# Altium PCB DEV_board_PCB.PcbDoc
Units mil, origin at the board's own origin, x right, y up, seen from the top; angles counter-clockwise.
Board outline 6000 x 4000 mil, 2 copper layers (Top Layer, Bottom Layer); 30 components, 57 nets, 212 pads, 0 vias.
Unrouted connection lines stored in the file: 63.
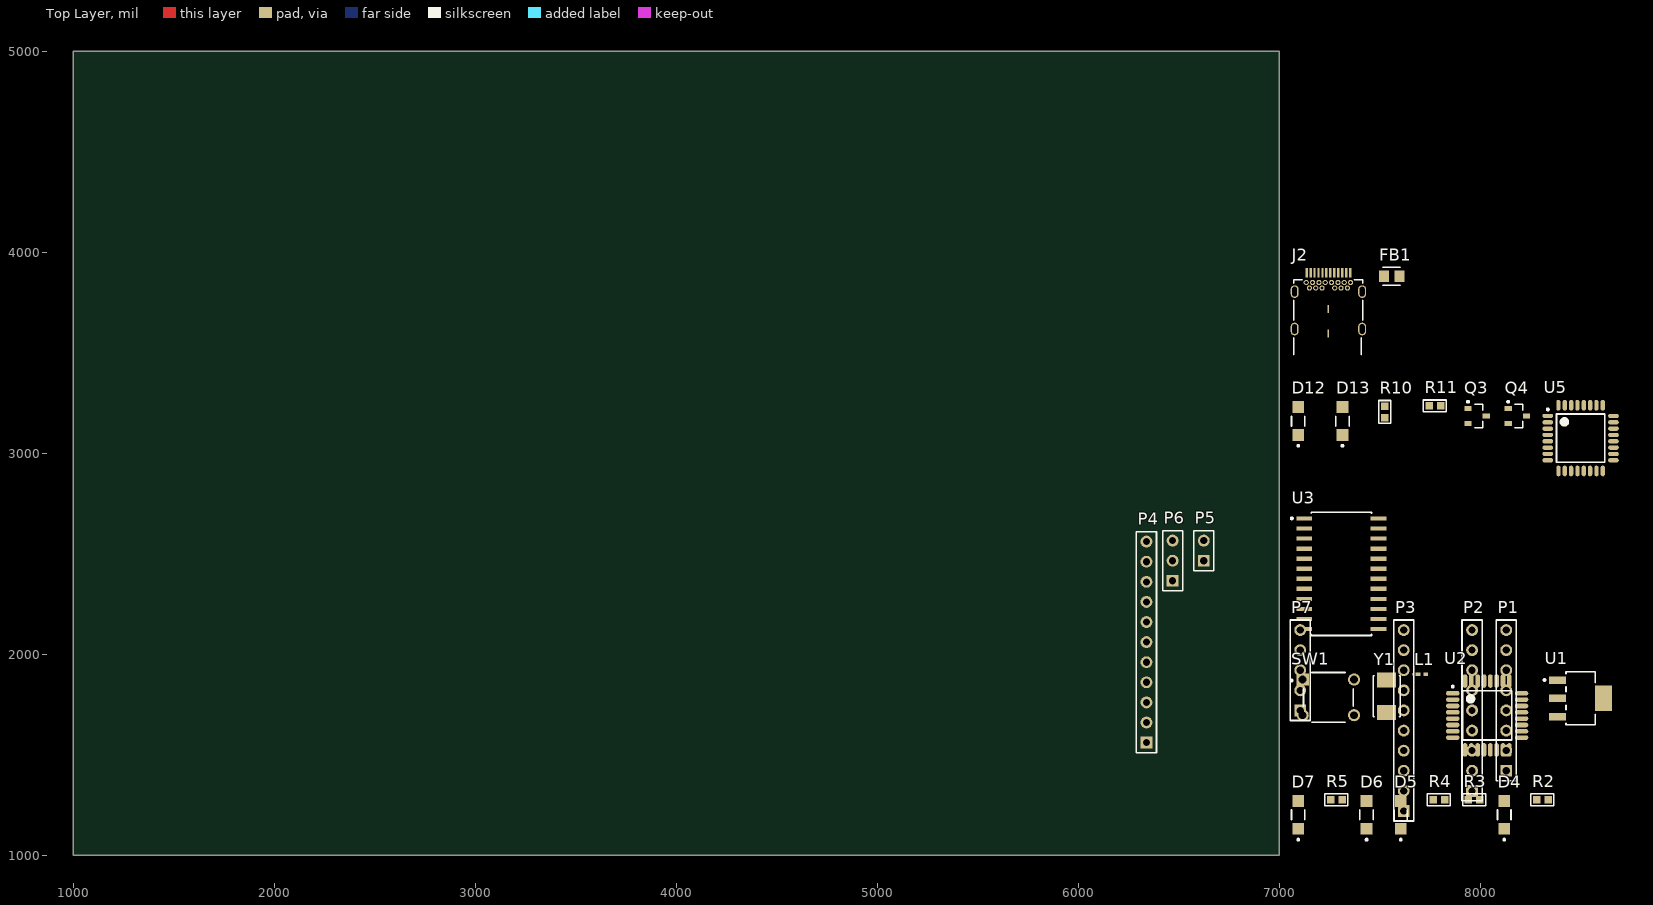
[diagram p0: Top Layer view]
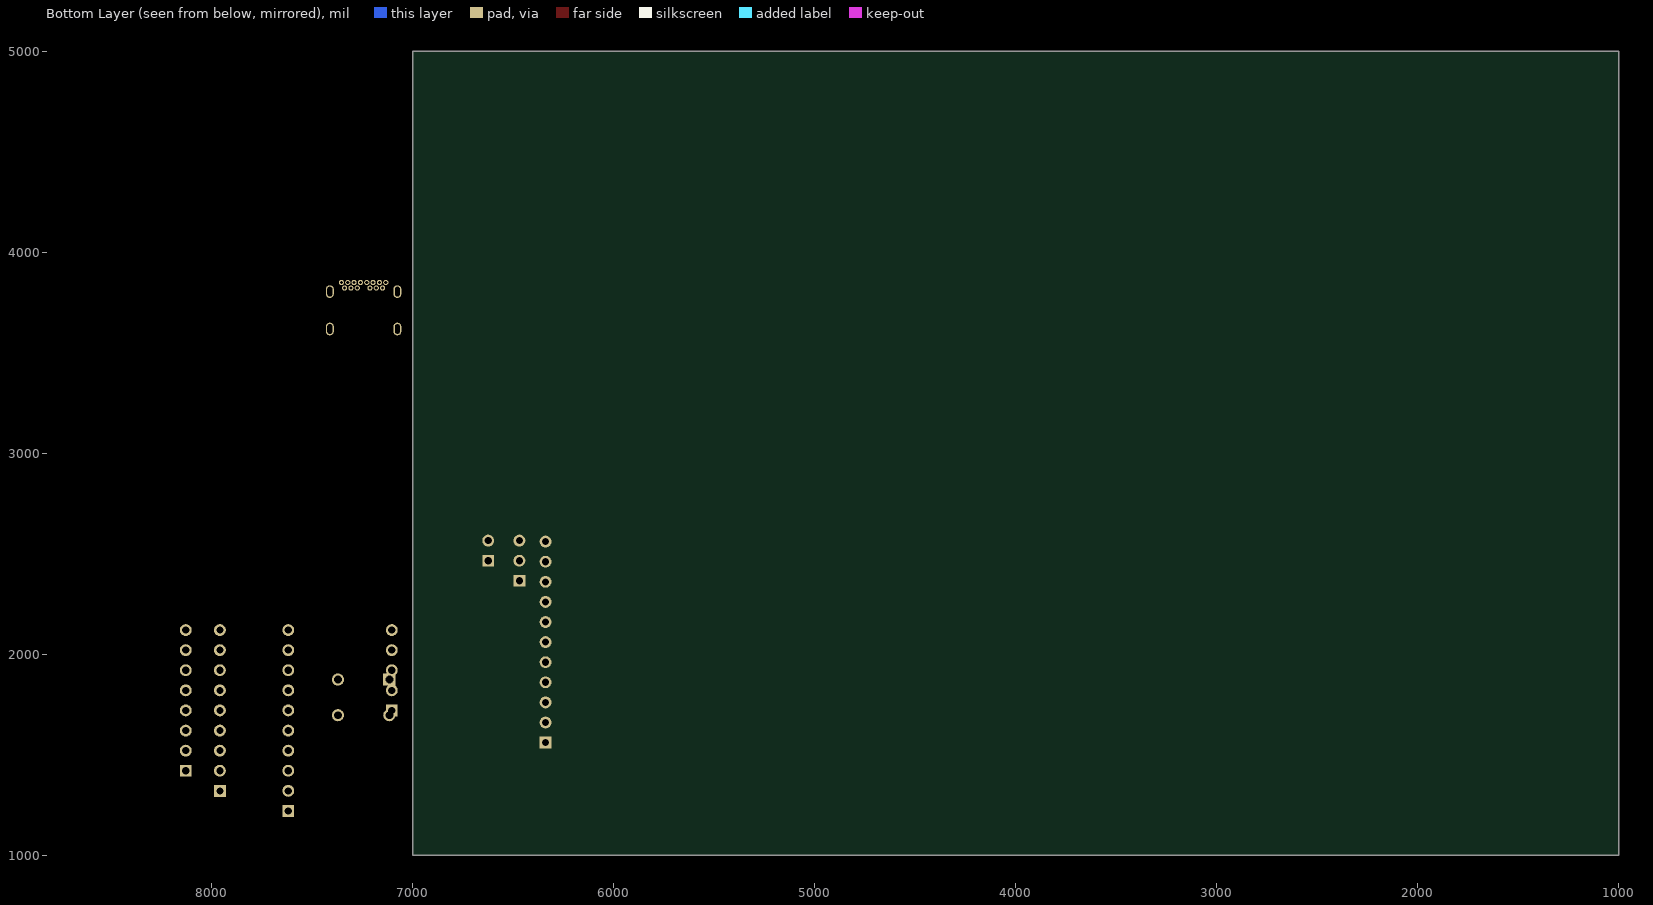
[diagram p1: Bottom Layer view, seen from below]

## Layer stack, top to bottom
Top Solder: solder mask 0.4, Solder Resist, Dk 3.5
Top Layer: signal copper 1.4
Dielectric 1: dielectric 12.6, FR-4, Dk 4.8
Bottom Layer: signal copper 1.4
Bottom Solder: solder mask 0.4, Solder Resist, Dk 3.5

## Board outline
1000,1000 7000,1000 7000,5000 1000,5000

## Design rules (kind name [scope] priority, off if disabled: settings)
Clearance [All] p1: gap=10 ignorepadtopadclearanceinfootprint=FALSE except(0: Arc-Hole Track-Hole SMDPad-Hole THPad-Hole Via-Hole Fill-Hole Poly-Hole Region-Hole Text-Hole)
DiffPairsRouting [All] p1: maxlimit=10 minlimit=10 mostfreqgap=10 toplayer_minwidth=15 toplayer_maxwidth=15 toplayer_prefwidth=15 bottomlayer_minwidth=15 bottomlayer_maxwidth=15 bottomlayer_prefwidth=15 maxuncoupledlength=500
PolygonConnect [All] p1: connectstyle=Relief reliefconductorwidth=10 reliefentries=4 polygonreliefangle="90 Angle" airgapwidth=10
RoomDefinition Designator_5 [InComponentClass('Designator')] p1: confinementstyle=ConfineIn formatcopy=TRUE lockcomponents=FALSE outline 0,0 2000,0 2000,1000 0,1000
RoomDefinition Designator_4 [InComponentClass('Designator')] p2: confinementstyle=ConfineIn formatcopy=TRUE lockcomponents=FALSE outline 0,0 2000,0 2000,1000 0,1000
RoomDefinition Connectors [InComponentClass('Connectors')] p3: confinementstyle=ConfineIn formatcopy=TRUE lockcomponents=FALSE outline 7045,1060 8190,1060 8190,2280 7045,2280
RoomDefinition USB_in [InComponentClass('USB_in')] p4: confinementstyle=ConfineIn formatcopy=TRUE lockcomponents=FALSE outline 7045,3425 7655,3425 7655,4035 7045,4035
RoomDefinition Designator [InComponentClass('Designator')] p5: confinementstyle=ConfineIn formatcopy=TRUE lockcomponents=FALSE outline 7045,2875 8700,2875 8700,3375 7045,3375
RoomDefinition Designator [InComponentClass('Designator')] p6: confinementstyle=ConfineIn formatcopy=TRUE lockcomponents=FALSE outline 7045,2875 8700,2875 8700,3375 7045,3375
RoutingVias [All] p1: holewidth=28 width=50 viastyle="Through Hole" minholewidth=28 minwidth=50 maxholewidth=28 maxwidth=50
SolderMaskExpansion [All] p1: expansion=4 istentingtop=FALSE
Width [All] p1: maxlimit=10 minlimit=10 preferedwidth=10
29 further rules are at their usual default settings.

## Classes and differential pairs
component class Connectors: P1 P2 P3 P4 P5 P6 P7
component class USB_in: C20 C21 C22 C23 D8 D9 D10 D11 FB1 FL1 J2
component class Designator: C24 C25 C26 C27 C28 D12 D13 Q3 Q4 R6 R7 R8 R9 R10 R11 U5
differential pair D: +D_P -D_N
differential pair DC: +DC_P -DC_N

## Components (designator, comment, footprint, x,y, rotation, side; value= is the part's Value field where it differs from the comment)
D4 "HSMS-C150" FP-HSMS-C150-MFG 8120,1200 r90 top
D5 "HSMS-C150" FP-HSMS-C150-MFG 7605,1200 r90 top
D6 "HSMS-C150" FP-HSMS-C150-MFG 7435,1200 r90 top
D7 "HSMS-C150" FP-HSMS-C150-MFG 7095,1200 r90 top
D12 "HSMS-C150" FP-HSMS-C150-MFG 7095,3160 r90 top
D13 "HSMS-C150" FP-HSMS-C150-MFG 7315,3160 r90 top
FB1 "MI0805K400R-10" FP-MI0805-MFG 7560,3880 r0 top
J2 "632723100011" 632723100011 7245,3665 r0 top
L1 "10uH" 0402-A 7710,1900 r0 top
P1 "Header 8" HDR1X8 8130,1420 r90 top
P2 "Header 9" HDR1X9 7960,1320 r90 top
P3 "Header 10" HDR1X10 7620,1220 r90 top
P4 "Header 11" HDR1X11 6340,1560 r90 top
P5 "Header 2" HDR1X2 6625,2465 r90 top
P6 "Header 3" HDR1X3 6470,2365 r90 top
P7 "Header 5" HDR1X5 7105,1720 r90 top
Q3 "MOSFET-P" "Tran SOT23" 7985,3185 r0 top
Q4 "MOSFET-P" "Tran SOT23" 8185,3185 r0 top
R2 "150R" "RES 0603 SILK" 8310,1275 r0 top
R3 "150R" "RES 0603 SILK" 7970,1275 r0 top
R4 "150R" "RES 0603 SILK" 7795,1275 r0 top
R5 "150R" "RES 0603 SILK" 7285,1275 r0 top
R10 "150R" "RES 0603 SILK" 7525,3205 r90 top
R11 "150R" "RES 0603 SILK" 7775,3235 r0 top
SW1 "1825910-2" FP-1825910-2-0 7245,1785 r0 top
U1 "LM3940IMP-3.3/NOPB" FP-DCY0004A-MFG 8500,1780 r0 top
U2 "ATMEGA328PB-AU" ATML-32A_M 8035,1695 r0 top
U3 "MAX7221CWG+" FP-W24-1-MFG 7310,2400 r0 top
U5 "FT232BL" LQFP-32_L 8500,3075 r0 top
Y1 "ABM3-8.000MHZ-D2Y-T" FP-ABM3-MFG 7535,1790 r90 top

## Footprints (in the part's own frame and the unit in brackets; to place one, negate y for a bottom-side part, rotate by r counter-clockwise, add the part's x,y. Pads: shape width x height; smd on the part's side, far side on the other; paste and mask are expansions set on the pad)
0402-A [mm] "Chip Inductor, Body 1.0x0.5mm, IPC High Density"
  rect 0.6x0.5 smd: 1(-0.5,0) 2(0.5,0)
  silkscreen extent -1.1,-0.15 -1.1,0.15, body extent -0.55,-0.3 0.55,0.3, height 0.55
632723100011 [mm] "USB 3.1 Type C Receptacle Horizontal THR"
  rect 0.3x1.2 smd: A1(-2.75,5.93) A2(-2.25,5.93) A3(-1.75,5.93) A4(-1.25,5.93) A5(-0.75,5.93) A6(-0.25,5.93) A7(0.25,5.93) A8(0.75,5.93) A9(1.25,5.93) A10(1.75,5.93) A11(2.25,5.93) A12(2.75,5.93)
  round 0.65 hole 0.4: B1(2.8,4.68) B2(2.4,3.98) B3(1.6,3.98) B4(1.2,4.68) B5(0.8,3.98) B6(0.4,4.68) B7(-0.4,4.68) B8(-0.8,3.98) B9(-1.2,4.68) B10(-1.6,3.98) B11(-2.4,3.98) B12(-2.8,4.68) G1(2,4.68) G2(-2,4.68)
  oval 1x1.6 hole 0.6 slot 1.2 at 90 deg: Shell(-4.27,-1.2) Shell(-4.27,3.53) Shell(4.27,-1.2) Shell(4.27,3.53)
  rect 0.2x1 smd: Shell(0,-1.75) Shell(0,1.35)
  silkscreen extent -4.37,-4.45 4.34,5, body extent -4.37,-5.6 4.37,6.19, height 3.05
ATML-32A_M [mm] "TQFP, 32-Leads, Body 7x7mm, Pitch 0.8mm, IPC Low Density"
  oval 1.7x0.6 smd: 1(-4.35,2.8) 2(-4.35,2) 3(-4.35,1.2) 4(-4.35,0.4) 5(-4.35,-0.4) 6(-4.35,-1.2) 7(-4.35,-2) 8(-4.35,-2.8) 17(4.35,-2.8) 18(4.35,-2) 19(4.35,-1.2) 20(4.35,-0.4) 21(4.35,0.4) 22(4.35,1.2) 23(4.35,2) 24(4.35,2.8)
  oval 0.6x1.7 smd: 9(-2.8,-4.35) 10(-2,-4.35) 11(-1.2,-4.35) 12(-0.4,-4.35) 13(0.4,-4.35) 14(1.2,-4.35) 15(2,-4.35) 16(2.8,-4.35) 25(2.8,4.35) 26(2,4.35) 27(1.2,4.35) 28(0.4,4.35) 29(-0.4,4.35) 30(-1.2,4.35) 31(-2,4.35) 32(-2.8,4.35)
  silkscreen extent -4.47,-3.1 3.1,3.77, body extent -4.5,-4.5 4.5,4.5, height 1.2
FP-1825910-2-0 [mm]
  rect 1.54x1.54 hole 0.99 paste-1000 mask+0: 1(-3.25,2.25)
  round 1.54 hole 0.99 paste-1000 mask+0: 2(3.25,2.25) 3(-3.25,-2.25) 4(3.25,-2.25)
  silkscreen extent -4.79,-3.15 3.15,3.15, body extent -4.12,-3.24 4.12,3.24, height 0.25
FP-ABM3-MFG [mm]
  rect 1.9x2.4 smd paste+0 mask+0: 1(-2.05,0) 2(2.05,0)
  silkscreen extent -2.6,-1.7 2.6,1.7, body extent -3.1,-1.8 3.1,1.8, height 0.25
FP-DCY0004A-MFG [mm]
  rect 2.15x0.95 smd paste+0 mask+0: 1(-2.9,2.3) 2(-2.9,0) 3(-2.9,-2.3)
  rect 2.15x3.25 smd paste+0 mask+0: 4(2.9,0)
  silkscreen extent -4.7,-3.35 1.85,3.35, body extent -4.08,-3.45 4.08,3.45, height 0.25
FP-HSMS-C150-MFG [mm]
  rect 1.5x1.5 smd paste+0 mask+0: 1(-1.75,0) 2(1.75,0)
  silkscreen extent -3.25,-0.85 0.63,0.85, body extent -2.6,-0.95 2.6,0.95, height 0.25
FP-MI0805-MFG [mm]
  rect 1.285x1.47 smd paste+0 mask+0: 1(-0.972,0) 2(0.972,0)
  silkscreen extent -1.1,-1.12 1.1,1.12, body extent -1.72,-0.83 1.72,0.83, height 0.25
FP-W24-1-MFG [mil]
  rect 78x21 smd paste+0 mask+0: 1(-184.5,275) 2(-184.5,225) 3(-184.5,175) 4(-184.5,125) 5(-184.5,75) 6(-184.5,25) 7(-184.5,-25) 8(-184.5,-75) 9(-184.5,-125) 10(-184.5,-175) 11(-184.5,-225) 12(-184.5,-275) 13(184.5,-275) 14(184.5,-225) 15(184.5,-175) 16(184.5,-125) 17(184.5,-75) 18(184.5,-25) 19(184.5,25) 20(184.5,75) 21(184.5,125) 22(184.5,175) 23(184.5,225) 24(184.5,275)
  silkscreen extent -252,-307 150,307, body extent -227,-314 227,314, height 10
HDR1X2 [mm] "Connector; Header; 2 Position"
  rect 1.5x1.5 hole 0.9: 1(0,0)
  round 1.5 hole 0.9: 2(2.54,0)
  silkscreen extent -1.27,-1.27 3.81,1.27
HDR1X3 [mm] "Connector; Header; 3 Position"
  rect 1.5x1.5 hole 0.9: 1(0,0)
  round 1.5 hole 0.9: 2(2.54,0) 3(5.08,0)
  silkscreen extent -1.27,-1.27 6.35,1.27
HDR1X5 [mm] "Connector; Header; 5 Position"
  rect 1.5x1.5 hole 0.9: 1(0,0)
  round 1.5 hole 0.9: 2(2.54,0) 3(5.08,0) 4(7.62,0) 5(10.16,0)
  silkscreen extent -1.27,-1.27 11.43,1.27
HDR1X8 [mm] "Connector; Header; 8 Position"
  rect 1.5x1.5 hole 0.9: 1(0,0)
  round 1.5 hole 0.9: 2(2.54,0) 3(5.08,0) 4(7.62,0) 5(10.16,0) 6(12.7,0) 7(15.24,0) 8(17.78,0)
  silkscreen extent -1.27,-1.27 19.05,1.27
HDR1X9 [mm] "Connector; Header; 9 Position"
  rect 1.5x1.5 hole 0.9: 1(0,0)
  round 1.5 hole 0.9: 2(2.54,0) 3(5.08,0) 4(7.62,0) 5(10.16,0) 6(12.7,0) 7(15.24,0) 8(17.78,0) 9(20.32,0)
  silkscreen extent -1.27,-1.27 21.59,1.27
HDR1X10 [mm] "Connector; Header; 10 Position"
  rect 1.5x1.5 hole 0.9: 1(0,0)
  round 1.5 hole 0.9: 2(2.54,0) 3(5.08,0) 4(7.62,0) 5(10.16,0) 6(12.7,0) 7(15.24,0) 8(17.78,0) 9(20.32,0) 10(22.86,0)
  silkscreen extent -1.27,-1.27 24.13,1.27
HDR1X11 [mm] "Connector; Header; 11 Position"
  rect 1.5x1.5 hole 0.9: 1(0,0)
  round 1.5 hole 0.9: 2(2.54,0) 3(5.08,0) 4(7.62,0) 5(10.16,0) 6(12.7,0) 7(15.24,0) 8(17.78,0) 9(20.32,0) 10(22.86,0) 11(25.4,0)
  silkscreen extent -1.27,-1.27 26.67,1.27
LQFP-32_L [mm] "Thin QFP, 32-Leads, Body 7x7mm, Pitch 0.8mm, IPC High Density"
  oval 1.35x0.55 smd: 1(-4.15,2.8) 2(-4.15,2) 3(-4.15,1.2) 4(-4.15,0.4) 5(-4.15,-0.4) 6(-4.15,-1.2) 7(-4.15,-2) 8(-4.15,-2.8) 17(4.15,-2.8) 18(4.15,-2) 19(4.15,-1.2) 20(4.15,-0.4) 21(4.15,0.4) 22(4.15,1.2) 23(4.15,2) 24(4.15,2.8)
  oval 0.55x1.35 smd: 9(-2.8,-4.15) 10(-2,-4.15) 11(-1.2,-4.15) 12(-0.4,-4.15) 13(0.4,-4.15) 14(1.2,-4.15) 15(2,-4.15) 16(2.8,-4.15) 25(2.8,4.15) 26(2,4.15) 27(1.2,4.15) 28(0.4,4.15) 29(-0.4,4.15) 30(-1.2,4.15) 31(-2,4.15) 32(-2.8,4.15)
  silkscreen extent -4.27,-3.05 3.05,3.75, body extent -3.5,-3.5 3.5,3.5, height 1.2
"RES 0603 SILK" [mm]
  rect 0.95x0.95 smd: 1(-0.725,0) 2(0.725,0)
  silkscreen extent -1.45,-0.75 1.45,0.75, body extent -0.85,-0.48 0.85,0.48, height 0.55
"Tran SOT23" [mm] "SOT23, 3-Leads, Body 2.90x2.30mm, Pitch 0.95mm, IPC Medium Density"
  rect 0.9x0.6 smd: 1(-1.15,0.95) 2(-1.15,-0.95) 3(1.15,0)
  silkscreen extent -1.27,-1.5 0.7,1.92, body extent -0.7,-1.5 0.7,1.5, height 1.1

## Part data
D4 D5 D6 D7 D12 D13: library part CMP-21615-000001-1, "LED RED DIFFUSED CHIP SMD", Case Code (Imperial)=1206, Case Code (Metric)=3216, Color=Red, Forward Current=20mA, Forward Voltage=2.1V, Lens Color=White, Max Operating Temperature=85°C, Min Operating Temperature=-40°C, Package Quantity=1, Power Dissipation=65mW, Reverse Voltage=5V, Case/Package=1206, Depth=1.6mm, Dominant Wavelength=626nm, Height=1.1mm, Illumination Color=Red, Lead Free="Lead Free", Length=3.2mm, Lens Style=Rectangular, Lens Transparency=Diffused, Luminous Intensity=10mcd, Mount="Surface Mount", Number of Elements=1, Number of LEDs=1, Number of Pins=2, Packaging="Tape and Reel", Power Rating=65mW, Radiation Hardening=No, REACH SVHC="No SVHC", Test Current=20mA, Viewing Angle=170°, Wavelength=626nm, Width=1.6mm
FB1: library part CMP-2000-06702-2, "FERRITE BEAD 40 OHM 0805 1LN", Case Code (Imperial)=0805, Case Code (Metric)=2012, Current Rating=1.5A, DC Resistance (DCR)=50mR, Frequency=100MHz, Max Operating Temperature=125°C, Min Operating Temperature=-40°C, Package Quantity=1, Tolerance=25%, Case/Package=0805, Contact Plating=Tin, Core Material=Ferrite, Depth=1.45mm, Height=0.043inch, Impedance=40R, Lead Free="Lead Free", Length=2mm, Material=Ferrite, Max Current Rating=1.5A, Max DC Current=1.5A, Mount="Surface Mount", Number of Lines=1, Packaging="Tape and Reel", Termination=SMD/SMT, Test Frequency=100MHz, Weight=0.00392oz, Width=0.049inch
J2: library part CMP-1502-03213-1, "USB 3.1 Type C Receptacle WR-COM, Horizontal, SMT / THT", Contact Resistance=30mOhm, Manufacturer="Wurth Elektronik", Operating Temperature=-40to105degC, Rated Current=5A, Working Voltage=20VDC, Connector Type=USB3.1TypeC, Datasheet URL=https://katalog.we-online.de/em/datasheet/632723x00011%282%29.pdf, Gender=Receptacle, Manufacturer URL=http://www.we-online.de, Mounting Technology=SMT/THT, Orientation=Horizontal, Package Reference=632723100011, Packaging=TapeandReel, Part Number=632723100011, Publisher=WurthElektronik
L1: "Inductor", Code_IEC=1005, Code_JEITA=0402, LatestRevisionDate=29-May-2009, LatestRevisionNote="IPC-7351 Footprint Added.", PackageDescription="Chip Inductor", PackageReference=0402-A, Published=8-Jun-2000, Publisher="Altium Limited"
P1: "Header, 8-Pin", LatestRevisionDate=17-Jul-2002, LatestRevisionNote="Re-released for DXP Platform.", Publisher="Altium Limited"
P2: "Header, 9-Pin", LatestRevisionDate=17-Jul-2002, LatestRevisionNote="Re-released for DXP Platform.", Publisher="Altium Limited"
P3: "Header, 10-Pin", LatestRevisionDate=17-Jul-2002, LatestRevisionNote="Re-released for DXP Platform.", Publisher="Altium Limited"
P4: "Header, 11-Pin", LatestRevisionDate=17-Jul-2002, LatestRevisionNote="Re-released for DXP Platform.", Publisher="Altium Limited"
P5: "Header, 2-Pin", LatestRevisionDate=17-Jul-2002, LatestRevisionNote="Re-released for DXP Platform.", Publisher="Altium Limited"
P6: "Header, 3-Pin", LatestRevisionDate=17-Jul-2002, LatestRevisionNote="Re-released for DXP Platform.", Publisher="Altium Limited"
P7: "Header, 5-Pin", LatestRevisionDate=17-Jul-2002, LatestRevisionNote="Re-released for DXP Platform.", Publisher="Altium Limited"
Q3 Q4: "P-Channel MOSFET", LatestRevisionDate=17-Jul-2002, LatestRevisionNote="Re-released for DXP Platform.", PackageDescription="TO, Flat Index; 3 In-Line, Axial Leads; Body Dia. 4.6mm; Lead Dia. 0.5 mm (max)", PackageReference=E3, PackageVersion=1995/1996, Published=8-Jun-2000, Publisher="Altium Limited"
R2 R3 R4 R5 R10 R11: "Resistor", LatestRevisionDate=17-Jul-2002, LatestRevisionNote="Re-released for DXP Platform.", PackageDescription="Axial Device, Thru-Hole; 2 Leads; 0.3 in Pin Spacing", PackageReference=AXIAL-0.3, Published=8-Jun-2000, Publisher="Altium Limited"
SW1: library part CMP-03407-000004-1, "SWITCH TACTILE SPST-NO 0.05A 24V", Contact Current Rating=50mA, Contact Resistance=100mΩ, Manufacturer=TE, Operating Force=160gf, Package=0, Temperature="-35°C to +85°C", Temperature Range High=+85°C, Temperature Range Low=-35°C, Voltage Rating Dc=24V, Automotive=No, Category=Switch, ComponentLink2Description=Datasheet, ComponentLink2URL=https://www.te.com/commerce/DocumentDelivery/DDEController?Action=showdoc&DocId=Customer+Drawing%7F1825910%7FC10%7Fpdf%7FEnglish%7FENG_CD_1825910_C10.pdf%7F1825910-2, Device Class L1=Electromechanical, Device Class L2=Switches, Device Class L3="Tactile Switches", Digikey Description="SWITCH TACTILE SPST-NO 0.05A 24V", Electromechanical Life=100000Cycles, Height=4.6mm, Lead Free=Yes, Manufacturer Part Number=1825910-2, Mount="Through Hole", Octopart=https://octopart.com/1825910-2-te+connectivity-42270502, RoHS=TRUE, Throw Configuration=SPST-NO
U1: library part CMP-0062-01788-4, "IC REG LINEAR 3.3V 1A SOT223-4", Case/Package=SOT-223, Current Rating=1A, Dropout Voltage=500mV, Max Input Voltage=7.5V, Max Operating Temperature=125°C, Max Output Voltage=3.3V, Min Input Voltage=4.5V, Min Operating Temperature=-40°C, Package Quantity=1000, Quiescent Current=15mA, Contact Plating=Tin, Height=1.6mm, Lead Free="Lead Free", Length=6.5mm, Max Output Current=1A, Max Supply Voltage=7.5V, Min Supply Voltage=4.5V, Mount="Surface Mount", Nominal Output Voltage=3.3V, Number of Outputs=1, Number of Pins=4, Number of Regulators=1, Output Configuration=Positive, Output Current=1A, Output Type=Fixed, Output Voltage=3.3V, Packaging="Tape and Reel", Polarity=Positive, Radiation Hardening=No, REACH SVHC="No SVHC", Series=-, Termination=SMD/SMT, Width=3.56mm
U2: library part CMP-2000-07439-1, "AVR Microcontroller, 1.8 to 5.5 V, 32 KB Flash, 1 KB EEPROM, 2 KB SRAM, -40 to 85 degC, 32-Pin TQFP (32A), RoHS, Tray", Manufacturer=Microchip, Package Description="32-Pin Thin Profile Plastic Quad Flat Package, Body 7 x 7 mm, Pitch 0.8 mm", Package Reference=32A, Datasheet URL=http://ww1.microchip.com/downloads/en/DeviceDoc/40001906A.pdf, Datasheet Version="Rev. A, 04/2017", Manufacturer URL=http://www.microchip.com/, Mounting Technology=SurfaceMount, RoHSCompliant=false
U3: library part CMP-05718-000002-1, "IC DRVR 7 SEGMNT 8 DIGIT 24SOIC", Manufacturer="Maxim Integrated", Max Junction Temp=+150°C, Max Power Dissipation=941mW, Max Supply Voltage=5.5V, Min Supply Voltage=4V, Nominal Supply Current=330mA, Package=W24-1, Temperature="0°C to +70°C", Temperature Range High=+70°C, Temperature Range Low=0°C, Automotive=No, Category=IC, ComponentLink2Description=Datasheet, ComponentLink2URL=https://datasheets.maximintegrated.com/en/ds/MAX7219-MAX7221.pdf, Device Class L1="Integrated Circuits (ICs)", Device Class L2="Power Management ICs", Device Class L3="LED Drivers", Digikey Description="IC DRVR 7 SEGMNT 8 DIGIT 24SOIC", Footprint Url=https://pdfserv.maximintegrated.com/land_patterns/90-0182.PDF, Height=2.65mm, Ipc Land Pattern Name=SOIC127P1032X250-24, Lead Free=Yes, Manufacturer Part Number=MAX7221CWG+, Mouser Description="In a Tube of 30, Maxim MAX7221CWG+, LED Driver, 8-Digits 64-Segments, 5 V, 24-Pin SOIC W", Number of Outputs=8, Octopart=https://octopart.com/max7221cwg%2B-maxim+integrated-39581478, RoHS=TRUE, Standoff Height=0.1mm
U5: library part CMP-0078-00024-3, "USB UART Asynchronous Serial Data Transfer Chip, 0 to +70 degC, 32-pin LQFP, Pb-Free", Manufacturer=FTDI, ComponentLink1Description="Manufacturer URL", ComponentLink1URL=http://www.ftdichip.com/, ComponentLink2Description=Datasheet, ComponentLink2URL=http://www.ftdichip.com/Support/Documents/DataSheets/ICs/DS_FT232BL_BQ.pdf, DatasheetVersion="ver 2.2, Nov-2011", PackageDescription="32-Pin Thin Quad Flat Pack, 7 x 7 mm Body, 0.8 mm Pitch", PackageReference=LQFP-32, PackageVersion=Nov-11, PartNumber=FT232BL
Y1: library part CMP-2000-05033-2, "Crystal 8MHz ±20ppm 18pF SMD-2 5mm x 3.2mm", Case/Package=CSMD, ESR (Equivalent Series Resistance)=140R, Frequency=8MHz, Frequency Stability=30ppm, Frequency Tolerance=20ppm, Load Capacitance=18pF, Max Operating Temperature=85°C, Min Operating Temperature=-40°C, Package Quantity=1000, Resistor Type=Ceramic, Series Resistance=500R, Depth=3.2mm, Height=0.051inch, Lead Free="Lead Free", Length=5mm, Mount="Surface Mount", Number of Pins=2, Packaging="Tape and Reel", Radiation Hardening=No, RoHS Compliant=Yes, Termination=SMD/SMT, Tolerance=20ppm, Width=3.2mm

## Nets (pads, with @x,y where several pads share a name; then routed paths per layer and width w, separated by ;. In a path a pad name is that pad's centre, name@x,y a point inside that pad or via, vN(x,y) a via of type N, cw(c..) or ccw(c..) an arc to the next point about the centre after c; other vN are vias at no path point)
+5: FB1.2 U1.1 U5.3 U5.4 U5.26
C\S\: U2.14
CS: U2.12 U3.12
D_N: J2.A6 J2.B7
D_P: J2.A7 J2.B6
DC_N: 
DC_P: 
GND: D6.1 D7.1 D12.1 D13.1 SW1.3 SW1.4 U1.2 U1.4 U2.5 U2.20 U2.21 U5.9 U5.14 U5.17 U5.29
MISO: U2.16
MOSI: U2.15 U3.1
NetC7_2: L1.1 U2.18
NetC8_2: SW1.2 U2.29
NetC24_2: U5.30
NetC28_2: U5.6
NetD4_1: D4.1
NetD4_2: D4.2 R2.1
NetD5_1: D5.1
NetD5_2: D5.2 R3.1
NetD6_2: D6.2 R4.1
NetD7_2: D7.2 R5.1
NetD8_2: 
NetD10_2: 
NetD12_2: D12.2 R10.1
NetD13_2: D13.2 R11.1
NetQ3_1: Q3.1 U5.11
NetQ3_3: Q3.3 R10.2
NetQ4_1: Q4.1 U5.12
NetQ4_3: Q4.3 R11.2
NetR7_2: U5.8
NetR8_2: U5.7
NetR9_1: U5.5
NetR12_1: SW1.1
PB1: U2.13
PC0: U2.23
PC1: U2.24
PC2: R4.2 U2.25
PC3: R5.2 U2.26
PD2: U2.32
PD3: U2.1
PD4: U2.2
PD5: U2.9
PD6: U2.10
PD7: U2.11
PE0: U2.3
PE1: U2.6
PE3: U2.19
PE4: U2.22
RXD: U2.30 U5.24
SCL: U2.28
SCLK: U2.17 U3.13
SDA: U2.27
TXD: U2.31 U5.25
USB: FB1.1 J2.A4 J2.A9 J2.B4 J2.B9
USB_GND: J2.A1 J2.A12 J2.B1 J2.B12 J2.G1 J2.G2 J2.Shell
VCC: L1.2 Q3.2 Q4.2 R2.2 R3.2 U1.3 U2.4 U5.13
XTAL1: U2.7 Y1.1
XTAL2: U2.8 Y1.2
pads on no net: J2.A2 J2.A3 J2.A5 J2.A8 J2.A10 J2.A11 J2.B2 J2.B3 J2.B5 J2.B8 J2.B10 J2.B11 P1.1 P1.2 P1.3 P1.4 P1.5 P1.6 P1.7 P1.8 P2.1 P2.2 P2.3 P2.4 P2.5 P2.6 P2.7 P2.8 P2.9 P3.1 P3.2 P3.3 P3.4 P3.5 P3.6 P3.7 P3.8 P3.9 P3.10 P4.1 P4.2 P4.3 P4.4 P4.5 P4.6 P4.7 P4.8 P4.9 P4.10 P4.11 P5.1 P5.2 P6.1 P6.2 P6.3 P7.1 P7.2 P7.3 P7.4 P7.5 U3.2 U3.3 U3.4 U3.5 U3.6 U3.7 U3.8 U3.9 U3.10 U3.11 U3.14 U3.15 U3.16 U3.17 U3.18 U3.19 U3.20 U3.21 U3.22 U3.23 U3.24 U5.1 U5.2 U5.10 U5.15 U5.16 U5.18 U5.19 U5.20 U5.21 U5.22 U5.23 U5.27 U5.28 U5.31 U5.32

## Text inside footprints (layer, text, board x,y; h text height)
J2: Mechanical 2 "PCB Edge" at 7178.07,3444.53 h24